# EAGLE board rj45-to-1x8pinhead (EAGLE 5.06)
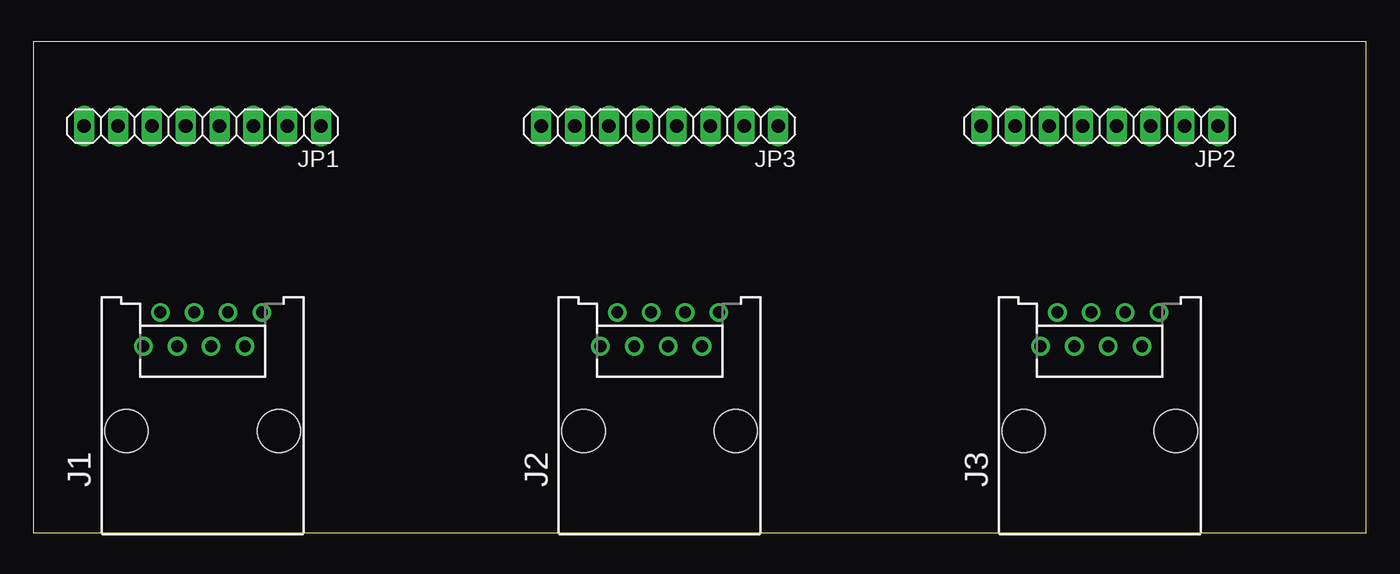
[diagram p0: board, top side]
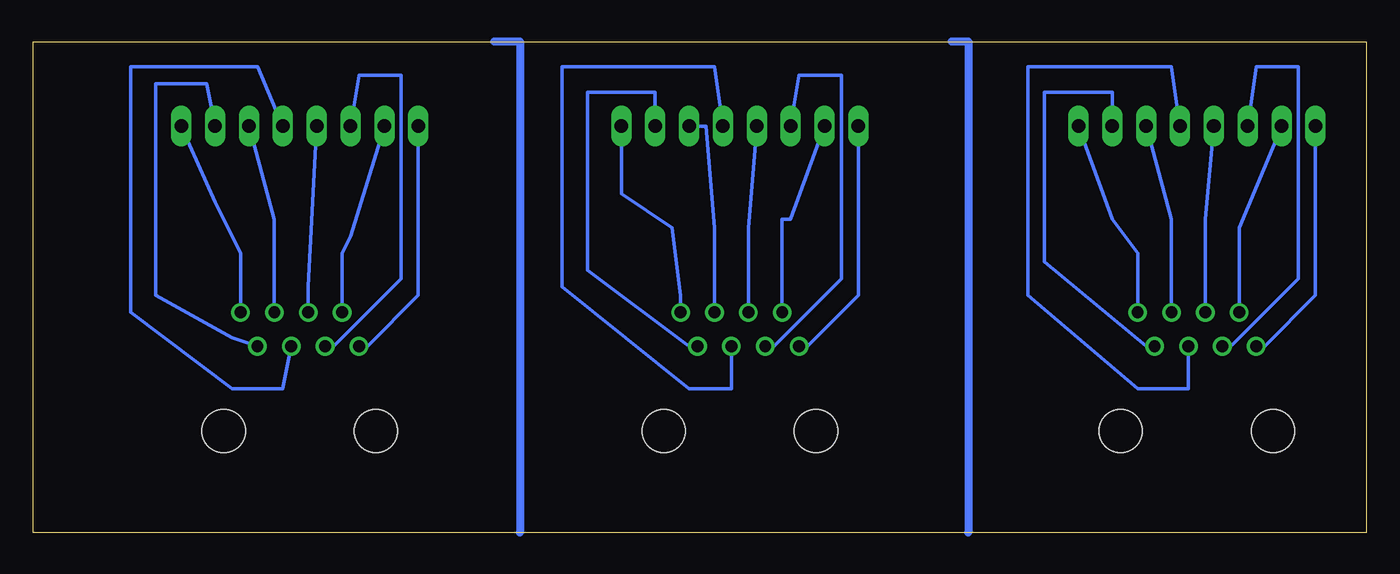
[diagram p1: board, bottom side, seen from below]

Size 100 x 36.82 mm. Coordinates in mm from the lower left corner, seen from the top.
Outline: 0,0 100,0 100,36.82 0,36.82 0,0
Copper layers (1*16): Top 0.035mm / dielectric 1.5mm / Bottom 0.035mm
Design rules "default": minimum track width 10mil, minimum drill 24mil, track to track 8mil, track to pad 8mil, pad to pad 8mil, via to via 8mil, smd to smd 8mil, copper to edge 40mil, drill to drill 8mil, minimum pad ring 10mil, minimum via ring 8mil, stop-mask expansion 4mil, vias tented up to drill 0mil, thermal gap 10mil

## Footprints (pad centres in the part's own frame; a part is rotated, then mirrored left to right if it is on the bottom)
215877-4 = drill 0.889 round: 1 -4.445,6.35; 2 -3.175,8.89; 3 -1.905,6.35; 4 -0.635,8.89; 5 0.635,6.35; 6 1.905,8.89; 7 3.175,6.35; 8 4.445,8.89 | hole 3.251: -5.715,0; 5.715,0
1X08 = drill 1.016 long: 1 -8.89,0; 2 -6.35,0; 3 -3.81,0; 4 -1.27,0; 5 1.27,0; 6 3.81,0; 7 6.35,0; 8 8.89,0

## Placement (x,y rotation side)
J1  [215877-4]  12.7,7.62 0 top
J2  [215877-4]  46.99,7.62 0 top
J3  [215877-4]  80.01,7.62 0 top
JP1  [1X08]  12.7,30.48 180 top
JP2  [1X08]  80.01,30.48 180 top
JP3  [1X08]  46.99,30.48 180 top

## Library data of the parts
J1-J3 = con-amp
JP1-JP3 = pinhead

## Nets
N$1: J1.1 JP1.8
N$2: J1.2 JP1.7
N$3: J1.3 JP1.6
N$4: J1.4 JP1.5
N$5: J1.5 JP1.4
N$6: J1.6 JP1.3
N$7: J1.7 JP1.2
N$8: J1.8 JP1.1
N$9: J2.1 JP3.8
N$10: J2.2 JP3.7
N$11: J2.3 JP3.6
N$12: J2.4 JP3.5
N$13: J2.5 JP3.4
N$14: J2.6 JP3.3
N$15: J2.7 JP3.2
N$16: J2.8 JP3.1
N$17: J3.1 JP2.8
N$18: J3.2 JP2.7
N$19: J3.3 JP2.6
N$20: J3.4 JP2.5
N$21: J3.5 JP2.4
N$22: J3.6 JP2.3
N$23: J3.7 JP2.2
N$24: J3.8 JP2.1

## Tracks (layer width: path | path; a pad name or v marks a point on that pad's centre or on a via)
N$1
  Bottom 0.254: JP1.8 3.81,17.78 7.62,13.97 J1.1
N$2
  Bottom 0.254: JP1.7 9.53,22.86 J1.2
N$3
  Bottom 0.254: JP1.6 8.26,34.92 5.08,34.92 5.08,19.05 10.16,13.97 J1.3
N$4
  Bottom 0.254: JP1.5 12.06,23.5 J1.4
N$5
  Bottom 0.254: JP1.4 14.61,34.92 25.4,34.92 25.4,17.78 17.14,10.79 13.34,10.79 J1.5
N$6
  Bottom 0.254: JP1.3 14.61,23.5 J1.6
N$7
  Bottom 0.254: JP1.2 19.05,33.02 24.13,33.02 24.13,20.32 16.51,13.97 J1.7
N$8
  Bottom 0.254: JP1.1 19.05,23.5 17.14,20.95 J1.8
N$9
  Bottom 0.254: JP3.8 38.1,17.78 41.91,13.97 J2.1
N$10
  Bottom 0.254: JP3.7 43.18,23.5 43.81,23.5 J2.2
N$11
  Bottom 0.254: JP3.6 42.55,34.29 39.37,34.29 39.37,19.05 44.45,13.97 J2.3
N$12
  Bottom 0.254: JP3.5 46.35,22.86 J2.4
N$13
  Bottom 0.254: JP3.4 48.9,34.92 60.33,34.92 60.33,18.41 50.8,10.79 47.62,10.79 J2.5
N$14
  Bottom 0.254: JP3.3 49.53,30.48 48.9,22.86 J2.6
N$15
  Bottom 0.254: JP3.2 53.34,33.02 58.42,33.02 58.42,19.68 50.8,13.97 J2.7
N$16
  Bottom 0.254: JP3.1 55.88,25.4 52.07,22.86 51.44,17.78 J2.8
N$17
  Bottom 0.254: JP2.8 71.12,17.78 74.93,13.97 J3.1
N$18
  Bottom 0.254: JP2.7 76.2,22.23 76.83,20.95 J3.2
N$19
  Bottom 0.254: JP2.6 75.56,34.29 72.39,34.29 72.39,19.05 77.47,13.97 J3.3
N$20
  Bottom 0.254: JP2.5 79.38,18.41 J3.4
N$21
  Bottom 0.254: JP2.4 83.19,34.92 92.71,34.92 92.71,16.51 85.09,10.79 81.28,10.79 J3.5
N$22
  Bottom 0.254: JP2.3 81.92,23.5 J3.6
N$23
  Bottom 0.254: JP2.2 87,33.66 90.81,33.66 90.81,17.78 85.09,14.61 J3.7
N$24
  Bottom 0.254: JP2.1 86.36,24.77 84.45,20.95 J3.8
N$25
  Bottom 0.61: 31.11,36.83 29.84,36.83 29.84,0
N$26
  Bottom 0.61: 65.41,36.83 63.5,36.83 63.5,0